# Altium PCB Remote_Circuit_Pcb.PcbDoc
Units mil, origin at the board's own origin, x right, y up, seen from the top; angles counter-clockwise.
Board outline 1643.03 x 1190.03 mil, 2 copper layers (Top Layer, Bottom Layer); 32 components, 17 nets, 93 pads, 1 vias.
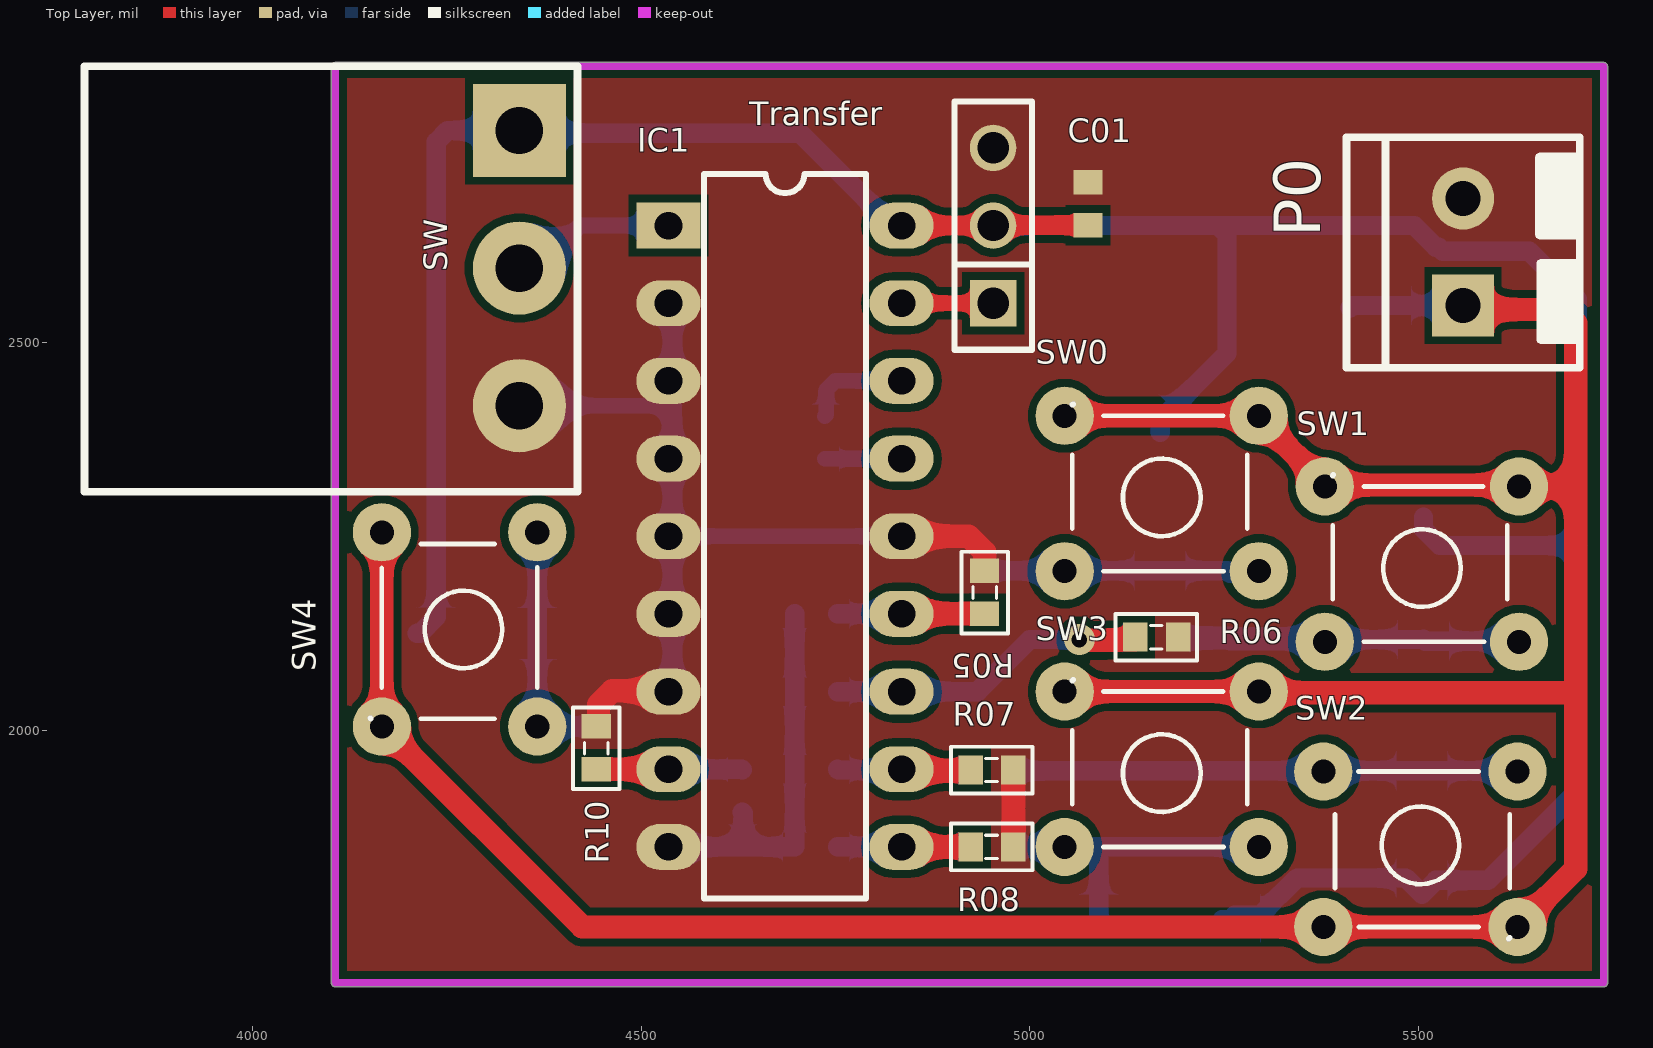
[diagram p0: Top Layer view]
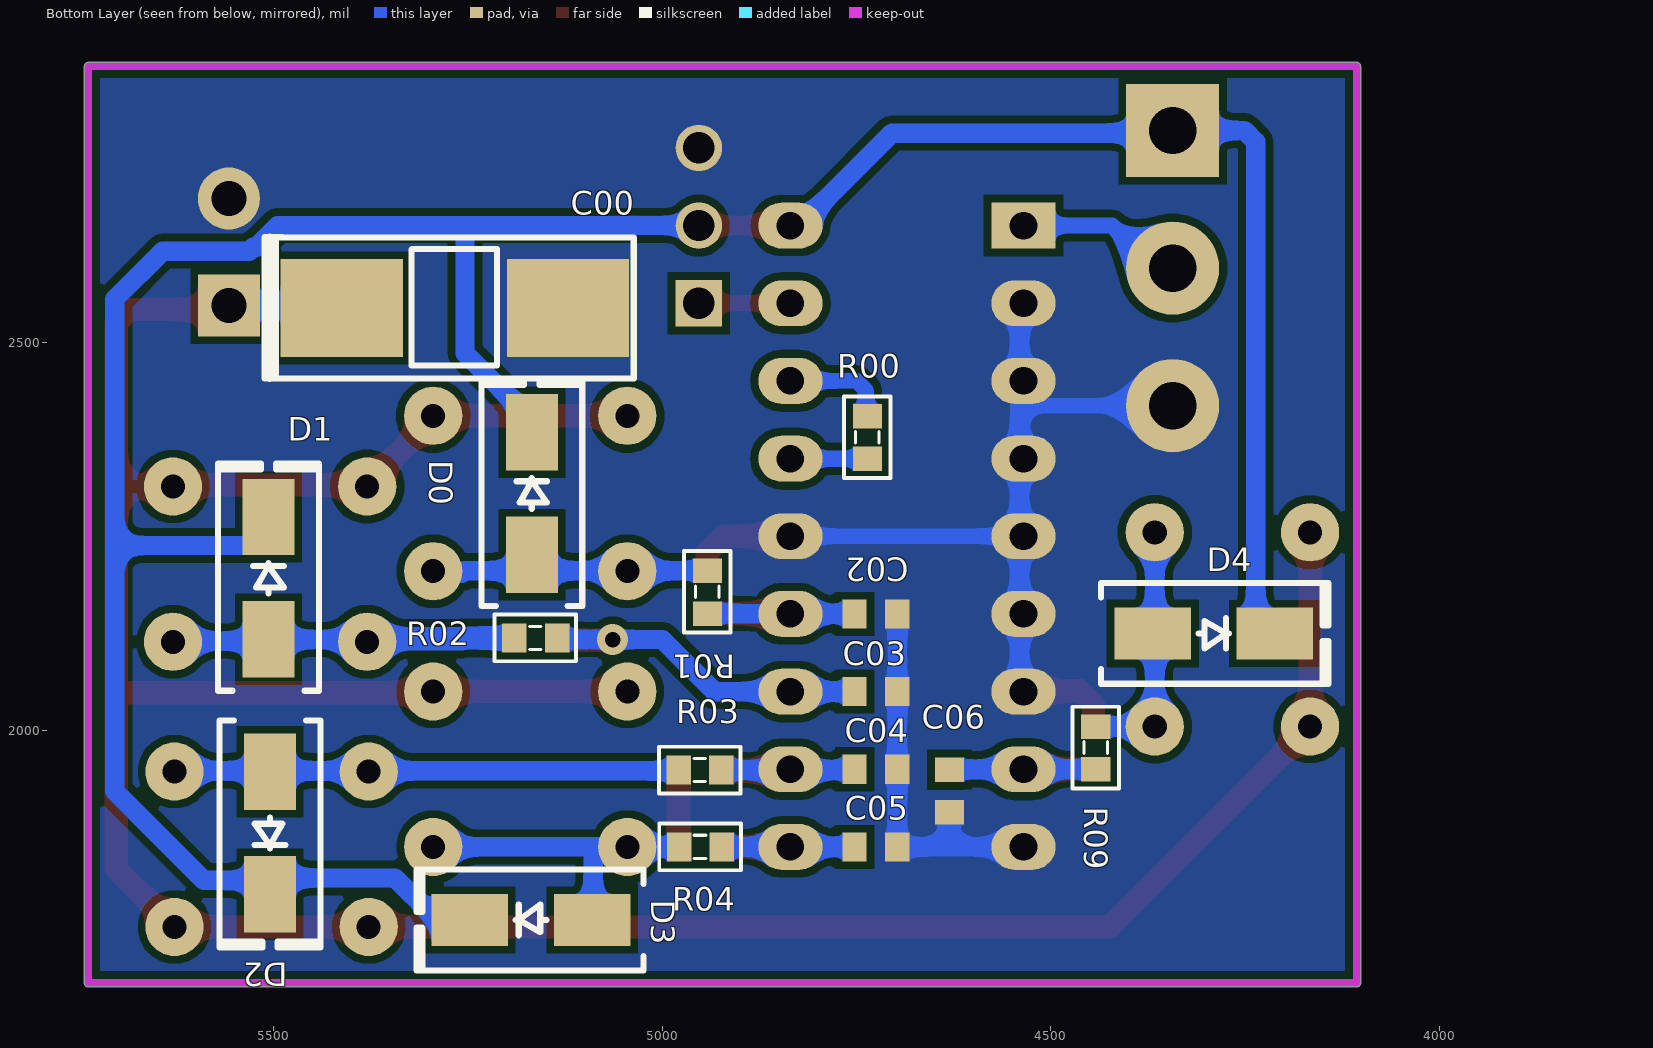
[diagram p1: Bottom Layer view, seen from below]
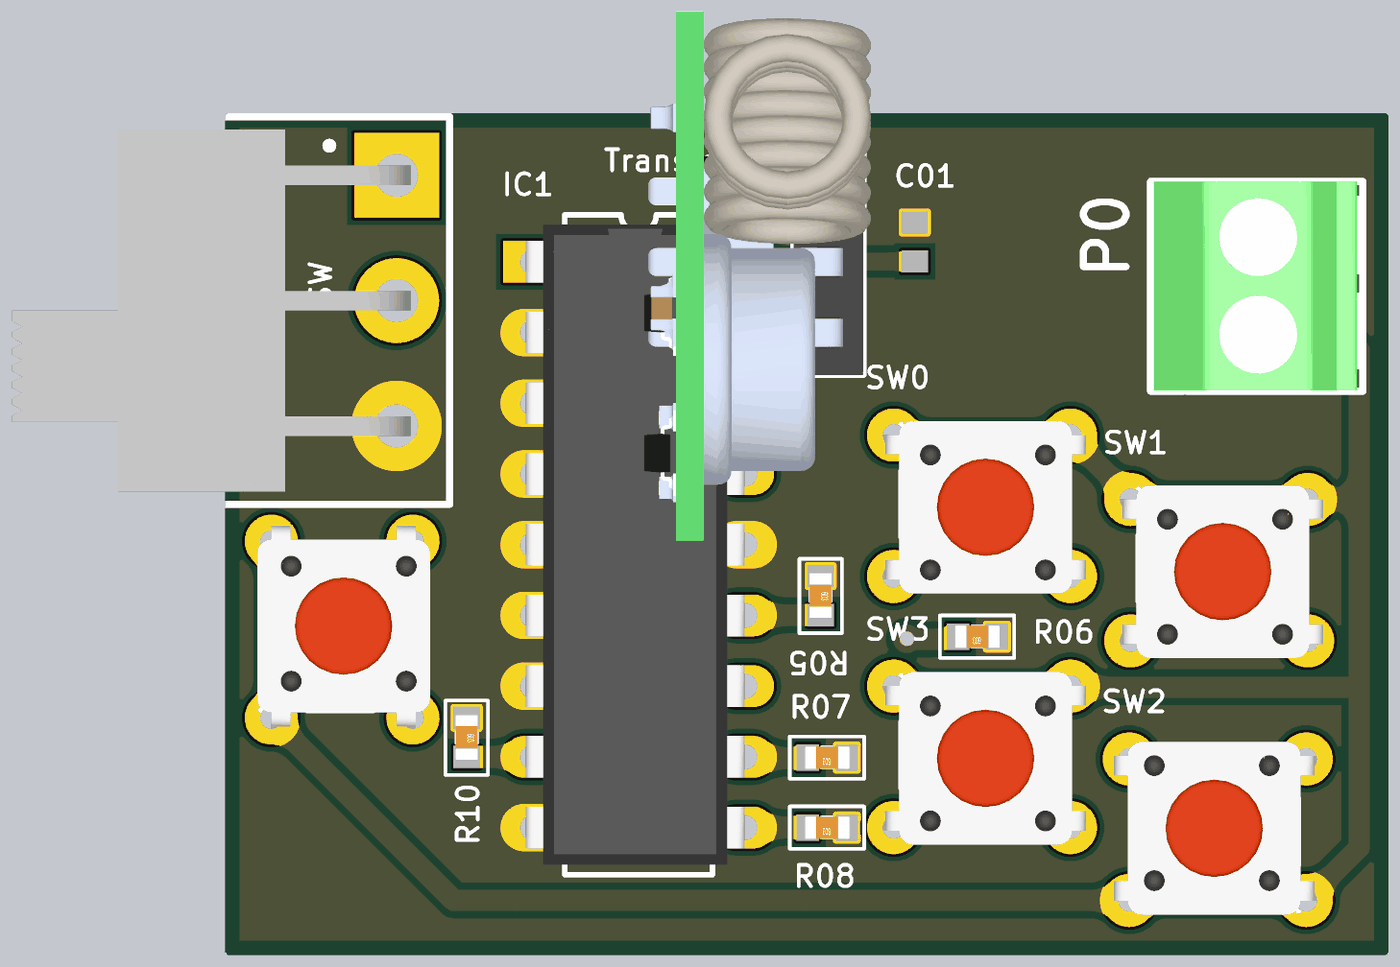
[diagram p2: 3D render of the assembled board from above, using the file's embedded part models]
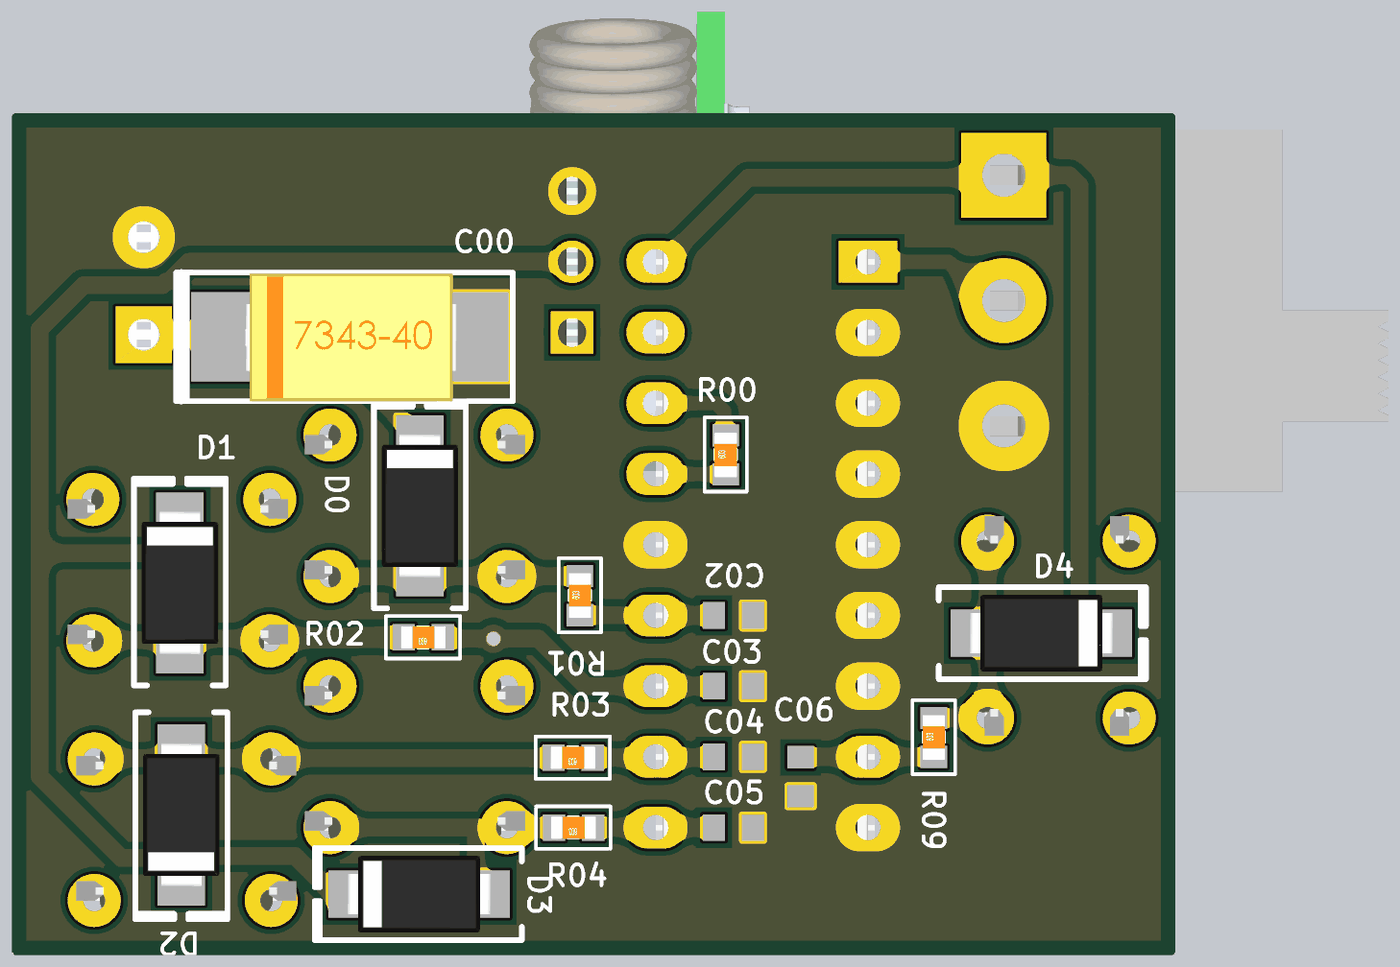
[diagram p3: 3D render of the assembled board from below, using the file's embedded part models]

## Layer stack, top to bottom
Top Solder: solder mask 0.4, Solder Resist, Dk 3.5
Top Layer: signal copper 1.4
Dielectric 1: dielectric 12.6, FR-4, Dk 4.8
Bottom Layer: signal copper 1.4
Bottom Solder: solder mask 0.4, Solder Resist, Dk 3.5

## Board outline
4100.98,1675 ccw(c4106,1675) 4106,1669.98 5739,1669.98 ccw(c5739,1675) 5744.02,1675 5744.02,2855 ccw(c5739,2855) 5739,2860.01 4106,2860.01 ccw(c4106,2855) 4100.98,2855

## Design rules (kind name [scope] priority, off if disabled: settings)
Clearance [All] p1: gap=10 ignorepadtopadclearanceinfootprint=FALSE except(5: Arc-Arc Arc-Track Track-Track; 8: Arc-SMDPad Track-SMDPad; 13: Arc-THPad Track-THPad; 20: Arc-Hole Track-Hole SMDPad-Hole THPad-THPad THPad-Hole Via-Hole Fill-Hole Poly-Hole Region-Hole Text-Hole)
PolygonConnect [All] p1: connectstyle=Direct reliefconductorwidth=10 reliefentries=4 polygonreliefangle="90 Angle" airgapwidth=10
RoutingVias [All] p1: holewidth=28 width=50 viastyle="Through Hole" minholewidth=10 minwidth=10 maxholewidth=28 maxwidth=50
SolderMaskExpansion [All] p1: expansion=4 istentingtop=FALSE
Width [All] p1: maxlimit=40 minlimit=10 preferedwidth=30 minimp=50.000000 maximp=50.000000 favimp=50.000000
30 further rules are at their usual default settings.

## Components (designator, comment, footprint, x,y, rotation, side; value= is the part's Value field where it differs from the comment)
C00 "100uF" "tu tantalum smd7343" 5267,2544 r180 bottom
C01 "Cap Non-Pol SMD" CAP-SM-0603 5075,2678 r270 top value=100nF
C02 "Cap Non-Pol SMD" CAP-SM-0603 4725,2150 r0 bottom value=100nF
C03 "Cap Non-Pol SMD" CAP-SM-0603 4725,2050 r0 bottom value=100nF
C04 "Cap Non-Pol SMD" CAP-SM-0603 4725,1950 r0 bottom value=100nF
C05 "Cap Non-Pol SMD" CAP-SM-0603 4725,1850 r0 bottom value=100nF
C06 "Cap Non-Pol SMD" CAP-SM-0603 4630,1922 r90 bottom value=100nF
D0 "M7" "DIODE SMA" 5168,2305 r90 bottom
D1 "M7" "DIODE SMA" 5507,2196 r90 bottom
D2 "M7" "DIODE SMA" 5505,1868 r270 bottom
D3 "M7" "DIODE SMA" 5169,1756 r0 bottom
D4 "M7" "DIODE SMA" 4290,2125 r180 bottom
IC1 "PT2262" DIP18 4685,2250 r270 top
P0 "Domino 2" "DOMINO SMALL 2" 5508,2547 r90 top
R00 "RESISTOR SMD" RES-SM-0603 4736,2350 r90 bottom value=3.3M
R01 "RESISTOR SMD" RES-SM-0603 4942,2151 r90 bottom value=2.7K
R02 "RESISTOR SMD" RES-SM-0603 5136,2119 r0 bottom value=2.7K
R03 "RESISTOR SMD" RES-SM-0603 4924.44,1949 r0 bottom value=2.7K
R04 "RESISTOR SMD" RES-SM-0603 4923.88,1850 r0 bottom value=2.7K
R05 "RESISTOR SMD" RES-SM-0603 4942,2205 r270 top
R06 "RESISTOR SMD" RES-SM-0603 5190.56,2120 r180 top
R07 "RESISTOR SMD" RES-SM-0603 4978.44,1949 r180 top
R08 "RESISTOR SMD" RES-SM-0603 4978.44,1850 r180 top
R09 "RESISTOR SMD" RES-SM-0603 4442,1950.44 r90 bottom
R10 "RESISTOR SMD" RES-SM-0603 4442,2004.56 r270 top
SW "Component_1" "Slide Switch" 4343,2595.17 r270 top
SW0 "SW" SW2-DIP 5295,2205 r180 top value="Button chip 4 pin"
SW1 "SW" SW2-DIP 5630,2114 r180 top value="Button chip 4 pin"
SW2 "SW" SW2-DIP 5378,1947 r0 top value="Button chip 4 pin"
SW3 "SW" SW2-DIP 5295,1850 r180 top value="Button chip 4 pin"
SW4 "SW" SW2-DIP 4366,2255 r270 top value="Button chip 4 pin"
Transfer "RF315-DEND-NOIC" RF315-SEND-NOIC 4953,2550 r90 top

## Footprints (in the part's own frame and the unit in brackets; to place one, negate y for a bottom-side part, rotate by r counter-clockwise, add the part's x,y. Pads: shape width x height; smd on the part's side, far side on the other; paste and mask are expansions set on the pad)
CAP-SM-0603 [mm] "SMD Ceramic Capacitor Size 0603"
  rect 0.8x0.95 smd: 1(-0.7,0) 2(0.7,0)
  body extent -0.85,-0.45 0.85,0.45, height 0.6
"DIODE SMA" [mm] "SMA"
  rect 2.5x1.7 smd: 1(-2,0) 2(2,0)
  silkscreen extent -3.68,-1.65 3.75,1.65, body extent -2.6,-1.37 2.6,1.37, height 2.4
DIP18 [mm] "DIP; 18 Leads; Row Spacing 7.62 mm; Pitch 2.54 mm"
  rect 1.5x2.1 hole 0.9: 1(-10.16,-3.81)
  oval 1.5x2.1 hole 0.9: 2(-7.62,-3.81) 3(-5.08,-3.81) 4(-2.54,-3.81) 5(0,-3.81) 6(2.54,-3.81) 7(5.08,-3.81) 8(7.62,-3.81) 9(10.16,-3.81) 10(10.16,3.81) 11(7.62,3.81) 12(5.08,3.81) 13(2.54,3.81) 14(0,3.81) 15(-2.54,3.81) 16(-5.08,3.81) 17(-7.62,3.81) 18(-10.16,3.81)
  silkscreen extent -11.85,-2.65 11.85,2.65, body extent -11.49,-4.06 11.5,3.81, height 5.08
"DOMINO SMALL 2" [mil] "3.5 mm"
  rect 80x80 hole 45: 1(0,-50)
  round 80 hole 45: 2(137.8,-50)
  silkscreen extent -80,-203 217,100, body extent -79,-192 217,95, height 335
RES-SM-0603 [mm]
  rect 0.8x0.95 smd: 1(-0.014,0) 2(1.386,0)
  silkscreen extent -0.64,-0.76 2.03,0.76, body extent -0.11,-0.4 1.49,0.4, height 0.3
RF315-SEND-NOIC [mm]
  rect 1.52x1.52 hole 1.02: 1(0,0)
  round 1.52 hole 1.02: 2(2.54,0) 3(5.08,0)
  silkscreen extent -1.52,-1.27 6.6,1.27, body extent -7.47,-1.53 11.53,6.6, height 27.22
"Slide Switch" [mil]
  rect 120x120 hole 61: 1(-177.17,0)
  round 120 hole 61: 2(0,0) 3(177.17,0)
  round 19.68 on Top Overlay: ""(-219,-95)
  silkscreen extent -260,-560 288,75, body extent -242,-543 270,20, height 363
SW2-DIP [mil] "SW button 4pin, 250 x250 mil"
  round 75 hole 31: 1(0,0) 2(0,-200) 3(250,-200) 4(250,0)
  silkscreen extent 15,-215 240,0, body extent -36,-220 276,24, height 276
"tu tantalum smd7343" [mm]
  rect 4x3.2 smd: 1(-3.7,0) 2(3.7,0)
  silkscreen extent -6.23,-2.31 5.85,2.31, body extent -3.75,-2.33 3.85,2.27, height 3.99

## Part data
C00: library part "Tu tantalum 100uF 50V SMD7343", "Dán", Chung_Loai=Dán, Don_Vi=Con, Ma_Hang=MH008401, So_Chan=2, Ten_Linh_Kien="Tụ tantalum 107T-100uF 50V SMD7343"
C01 C02 C03 C04 C05 C06: "Capacitor"
D0 D1 D2 D3 D4: library part "Diode M7 ( 4007 )", "Dán", Chung_Loai=Dán, Don_Vi=Con, Ma_Hang=MH000944, Ten_Linh_Kien="Diode M7 1N4007 SMD 1A 1000V"
IC1: "Remote Control Encoder"
P0: "Domino, 2-Pin", LatestRevisionDate=17-Jul-2002, LatestRevisionNote="Re-released for DXP Platform.", Publisher="Altium Limited"
R00 R01 R02 R03 R04 R05 R06 R07 R08 R09 R10: "Resistor"
SW0 SW1 SW2 SW3 SW4: library part SW4, "Switch button 4 pin"
Transfer: Manufacturer="W¨¹rth Elektronik eiSos GmbH", partNo=613004143121, ComponentLink1 Description=Manufacturer, ComponentLink1URL=http://www.we-online.com, ComponentLink2 Description=Datasheet, ComponentLink2URL=http://katalog.we-online.de/em/datasheet/6130xx143121.pdf, Created by="Karrer Zheng", Created Date="29 March 2013", NoPins=04

## Via types
v1: diameter 40, hole 20, Top Layer to Bottom Layer, tented both sides, 1 vias

## Nets (pads, with @x,y where several pads share a name; then routed paths per layer and width w, separated by ;. In a path a pad name is that pad's centre, name@x,y a point inside that pad or via, vN(x,y) a via of type N, cw(c..) or ccw(c..) an arc to the next point about the centre after c; other vN are vias at no path point)
12V: C00.1 P0.1 SW0.2 SW0.3 SW1.2 SW1.3 SW2.2 SW2.3 SW3.2 SW3.3 SW4.2 SW4.3 | length 4299.1
  Top Layer w30: SW4.2 SW4.3 4424,1747 SW2.2 SW2.3 5703,1822 5703,2054 ; SW3.3 SW3.2 5296.5,2048.5 5697.5,2048.5 5703,2054 ; SW0.3 5050,2405 5054,2401 5058,2405 SW0.2 5295,2402 5380,2317 SW1.3 5382,2316 5628,2316 SW1.2 SW1.2@5630,2317 ; P0.1 5563,2542 5685.43,2542 5703,2524.43 5703,2314 ; SW1.2@5629.5,2317.5 SW1.2@5630,2317 ; SW1.2@5630,2317 5633,2314 5703,2314 ; 5703,2054 5703,2314
  Bottom Layer w25: C00.1 5415.67,2547 5542,2547 5543,2548 5544,2547 P0.1
DATA: IC1.17 Transfer.1 | length 118.8
  Top Layer w20: IC1.17 Transfer.1@4950,2550
  Top Layer w30: Transfer.1@4950,2550 4951,2549 4952,2550 Transfer.1
GND: C00.2 C01.1 C02.1 C03.1 C04.1 C05.1 C06.1 IC1.2 IC1.3 IC1.4 IC1.5 IC1.6 IC1.7 IC1.9 IC1.14 P0.2 R05.1 R06.1 R07.1 R08.1 R10.1 SW.3 Transfer.3 | length 1893.4
  Top Layer w30: R10.1 4444.25,2005.12 4445,2005.87 4445,2033.43 4462.57,2051 4534,2051 IC1.7 ; IC1.14 4921.34,2250 4942,2229.34 R05.1 4941.25,2206.31 R05.1@4938.91,2206.31 ; R08.1 R07.1
  Bottom Layer w20: SW.3 4373,2418 4385,2430 4385,2422.19 4389.19,2418 4540,2418 ; IC1.5 4540,2250 IC1.14
  Bottom Layer w25: IC1.9 4631,1850 ; IC1.7 4540,2055 4540,2150 4540,2250 4540,2350 4540,2418 4540,2545 IC1.2 ; C06.1 4630.25,1894.44 4631,1893.69 4631,1850 ; C02.1 C05.1 4631,1850
NetD0_1: D0.1 R01.2 SW0.1 SW0.4 | length 355.7
  Bottom Layer w25: R01.2 5254.44,2205.56 5258,2202 5292,2202 SW0.1
NetD1_1: D1.1 R02.2 SW1.1 SW1.4 | length 444.2
  Bottom Layer w25: SW1.4 5383,2117 5506.74,2117 D1.1 5509.26,2115 5629,2115 SW1.1
  Bottom Layer w30: R02.2 5257,2119 5258,2118 5376,2118 SW1.4
NetD2_1: D2.1 R03.2 SW2.1 SW2.4 | length 650
  Bottom Layer w25: R03.2 4979,1948.75 4979.75,1948 5627,1948 SW2.4
NetD3_1: D3.1 R04.2 SW3.1 SW3.4 | length 421.4
  Bottom Layer w25: R04.2 SW3.4 5090,1850 ; D3.1 5090.26,1759.74 5089,1761 5089,1849 5090,1850 ; SW3.1 SW3.1@5295,1849 ; SW3.1@5301,1843 SW3.1@5295,1849 ; 5090,1850 5294,1850 SW3.1@5295,1849
NetD4_1: D4.1 R09.2 SW4.1 SW4.4 | length 326
  Bottom Layer w25: SW4.1 SW4.4 R09.2
NetIC1_1: IC1.1 SW.2 | length 214.7
  Bottom Layer w20: SW.2 4366.17,2595.17 4421,2650 IC1.1
NetIC1_15: IC1.15 R00.1 | length 99.2
  Bottom Layer w20: R00.1 4736.28,2349.72 4834.72,2349.72 IC1.15
NetIC1_16: IC1.16 R00.2 | length 136.4
  Bottom Layer w20: R00.2 4738,2406.56 4738,2438.28 4749.72,2450 IC1.16
OUT0: C02.2 IC1.13 R01.1 R05.2 | length 296.8
  Top Layer w30: IC1.13 4835.22,2150.22 4941.78,2150.22 R05.2
  Bottom Layer w25: C02.2 IC1.13 4886,2150 4886.44,2150.44 R01.1
OUT1: C03.2 IC1.12 R02.1 R06.2 | length 486.4
  Top Layer w30: v1(5064,2117) 5065,2116 5099,2116 5099.3,2116.3 5135.25,2116.3 5136,2117.05 R06.2
  Bottom Layer w25: C03.2 IC1.12 4933,2050 5000,2117 v1(5064,2117) R02.1@5135.44,2117
OUT2: C04.2 IC1.11 R03.1 R07.2 | length 262.2
  Top Layer w30: IC1.11 4837,1948 4923.13,1948 4923.88,1948.75 R07.2
  Bottom Layer w25: C04.2 4752.56,1949.75 4753.31,1949 R03.1
OUT3: C05.2 IC1.10 R04.1 R08.2 | length 259.6
  Top Layer w30: IC1.10 R08.2
  Bottom Layer w25: C05.2 IC1.10 R04.1
OUT4: C06.2 IC1.8 R09.1 R10.2 | length 281.2
  Top Layer w30: R10.2 IC1.8
  Bottom Layer w25: R09.1 4442.12,1950 IC1.8 4629.56,1950 C06.2
VCC: C01.2 D0.2 D1.2 D2.2 D3.2 D4.2 IC1.18 SW.1 Transfer.2 | length 4034.8
  Top Layer w25: IC1.18 Transfer.2 4953.44,2650.44 C01.2
  Bottom Layer w25: D4.2 4215.04,2125 4236,2145.96 4236,2757.69 4250.64,2772.33 SW.1 4346.33,2769 4704.19,2769 4823.19,2650 IC1.18 ; Transfer.2 5242.28,2650 ; D0.2 5168,2399.49 5254,2485.49 5254,2638.28 5242.28,2650 ; D3.2 D3.2@5263.49,1756 ; D3.2@5264,1762 5296.1,1762 5344.1,1810 5484.26,1810 D2.2 5522.74,1807 5590,1807 5705,1922 5705,2238 ; D1.2 5507,2258.99 5527.96,2238.03 5542.58,2238.03 ; 5542.61,2238 5705,2238 ; 5242.28,2650 5254,2650 5495.07,2650 5522.82,2622.25 5526.36,2622.25 5531.61,2617 5643,2617 5705,2555 5705,2238
pads on no net: SW.

## Polygon pours and split planes (outlines as drawn)
GND on Top Layer "NONET_L-01_P-001" (solid, pour order 0): 4111,2850 5734,2850 5734,1680 4111,1680
GND on Bottom Layer "NONET_L-01_P-001" (solid, pour order 1): 4111,2850 5734,2850 5734,1680 4111,1680

## Keep-outs
Keep-Out Layer:
  lines w10: 4106,1675 4106,2855 5739,2855 5739,1675 4106,1675